# Allegro board 112G_224G_Serdes_PCB.brd
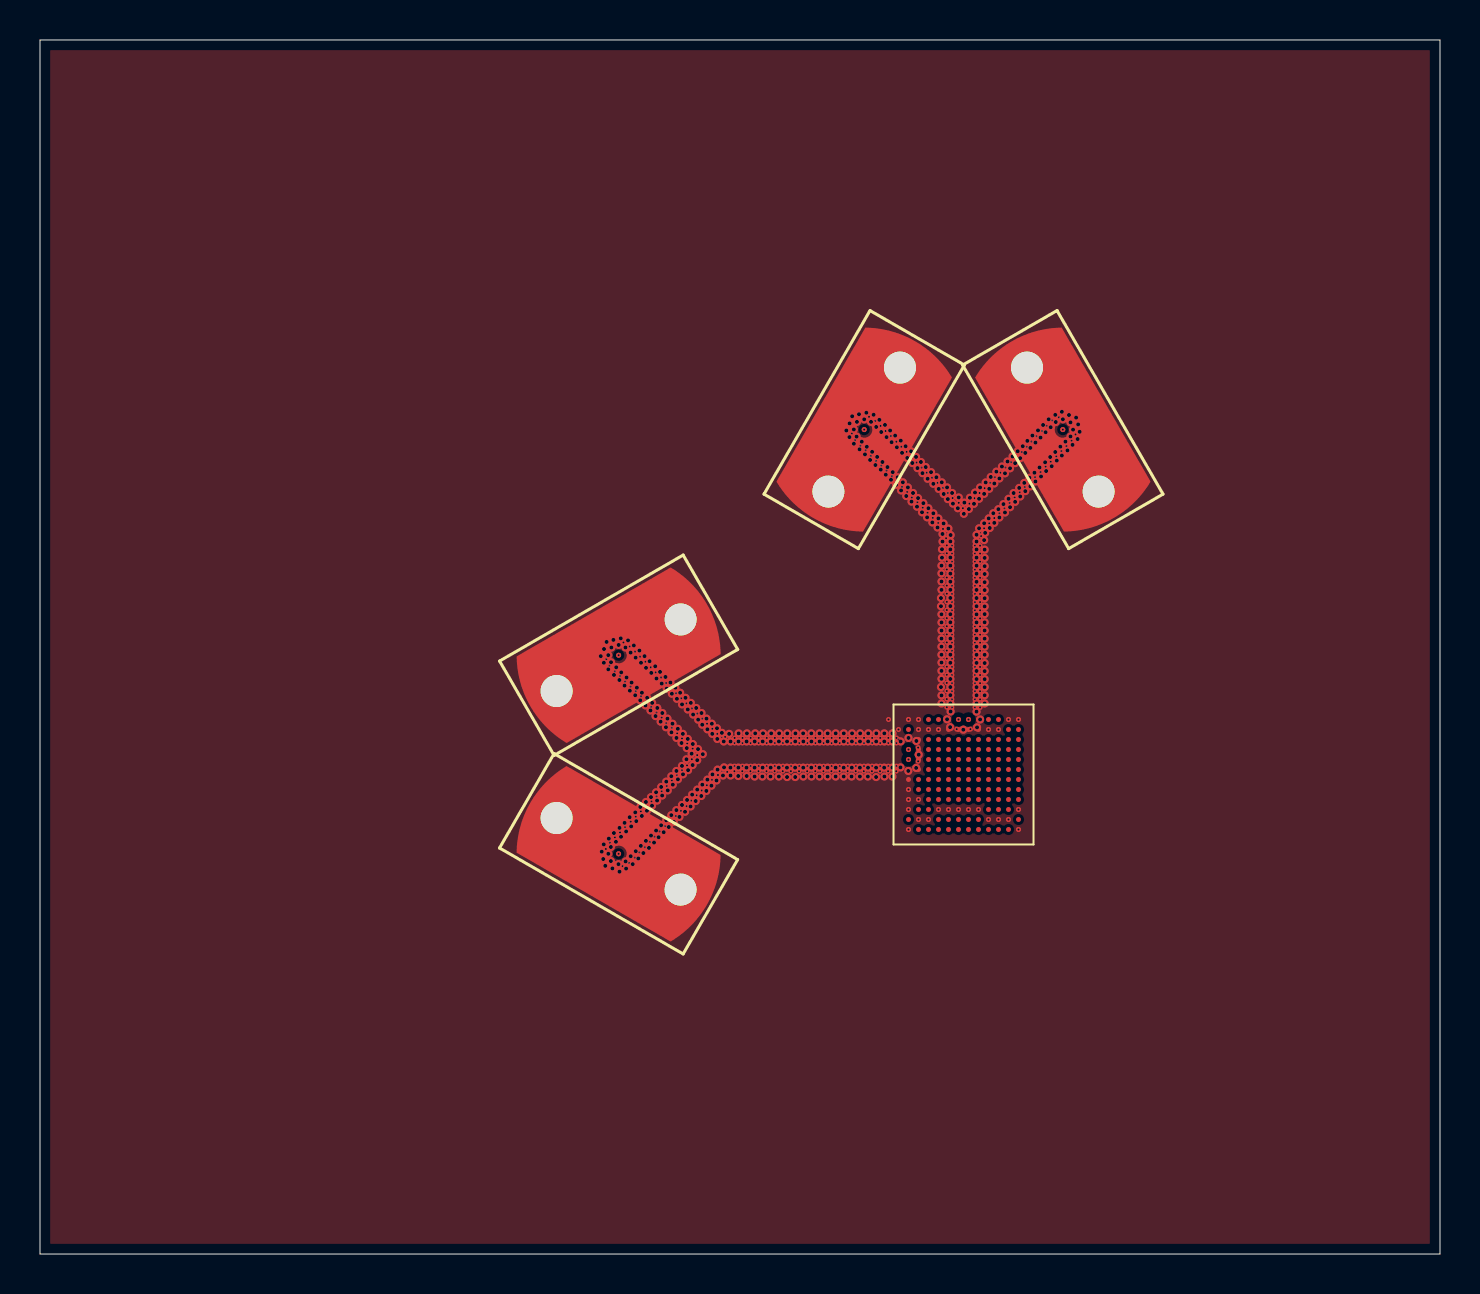
[diagram p0: board, top side]
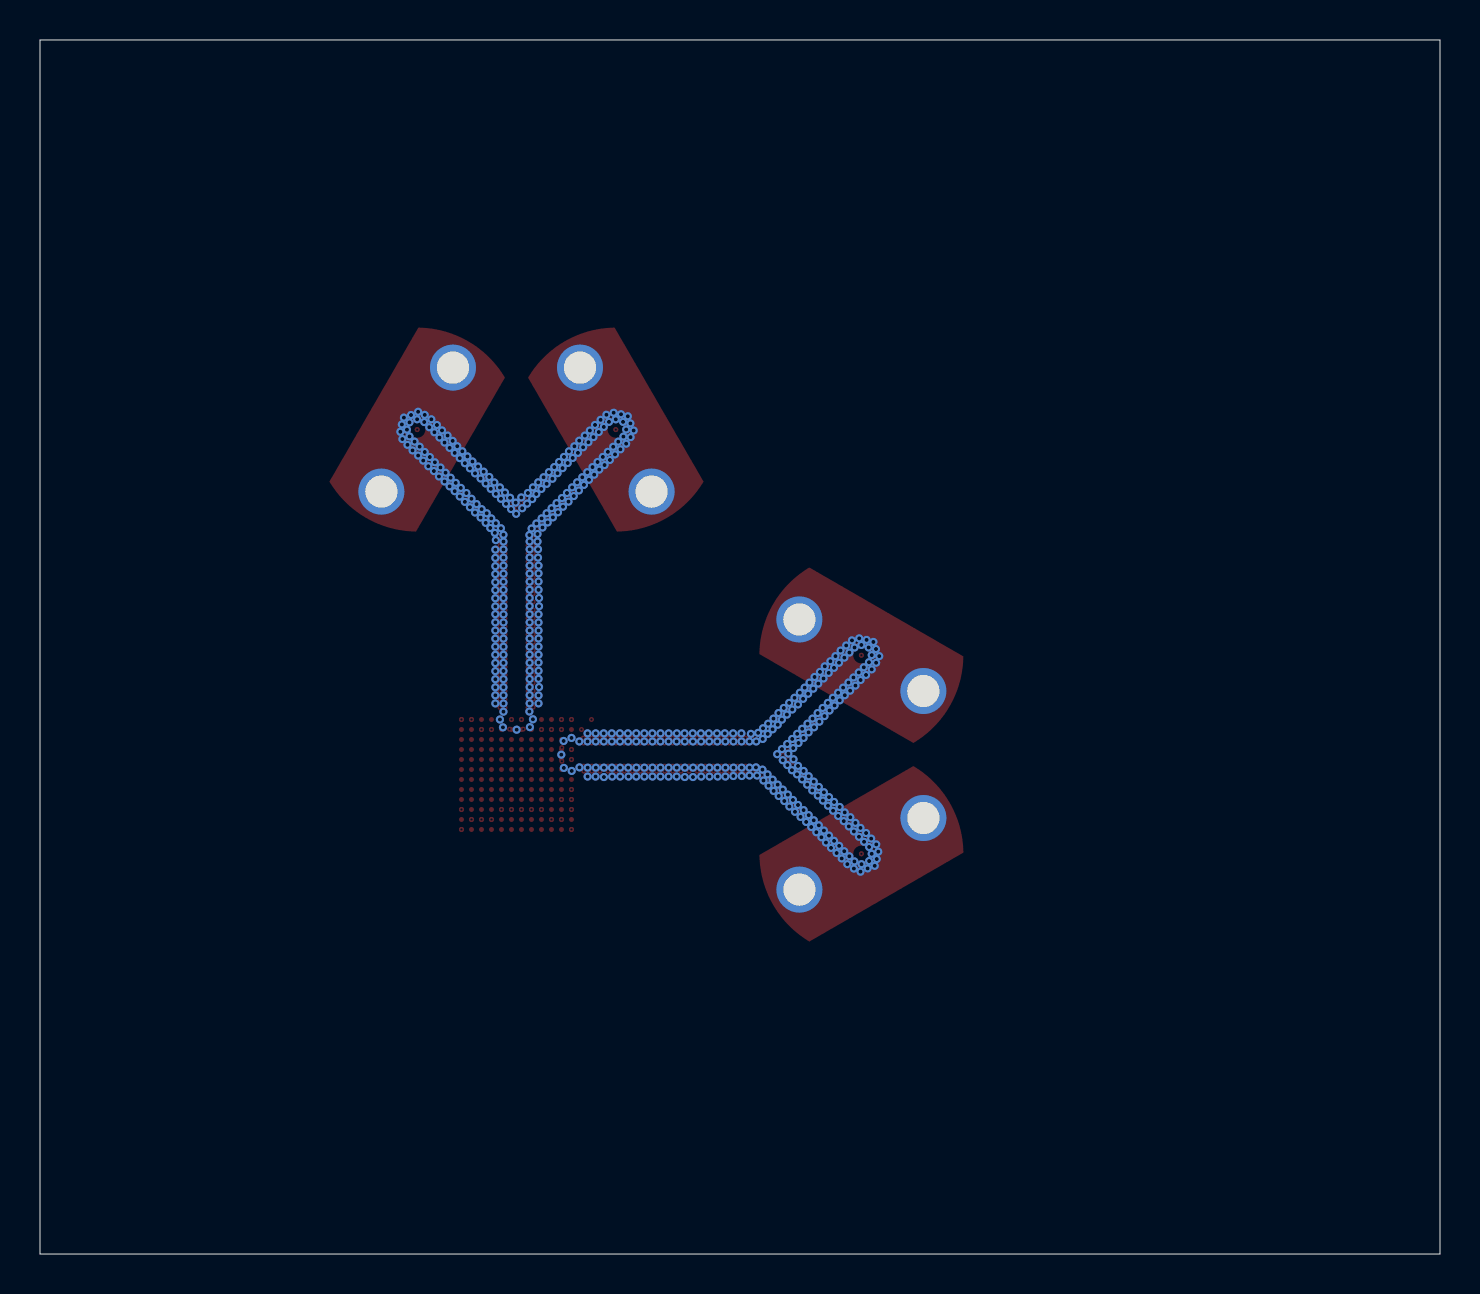
[diagram p1: board, bottom side, seen from below]

Outline 70 x 60.71 mm; copper layers: TOP, SIGNAL02, GND03, GND04, GND05, GND06, GND07, BOTTOM. Coordinates in mm from the lower left corner of the outline.
Outline path: 0,60.71 0,0 70,0 70,60.71 0,60.71

## Design rules (mm)
constraint set DEFAULT: min track width 0.132
net group SDS_RX0: nets SDS_RX0N SDS_RX0P
net group SDS_TX0: nets SDS_TX0N SDS_TX0P

## Placement (name value [footprint] x y rotation side)
J1  -  [DJ0S-6H]  41.21 41.22 60 top
J2  -  [DJ0S-6H]  51.14 41.22 300 top
J3  -  [DJ0S-6H]  28.93 29.94 210 top
J4  -  [DJ0S-6H]  28.93 20.01 330 top
NOREF  -  []  -70.45 -75.56 0 top
NOREF#2  -  []  -32.97 74.68 0 top
U1  P1_4  [BGA144]  46.18 23.98 0 top

## Library data of the parts
J1-J4 = DJ0S-6H
U1 = P1_8

## Footprints (pads in the part's own frame, mm; a bottom-side part is the same pattern mirrored in y, then rotated)
BGA144
  round 0.25 smd: A1(-2.75,2.75) A2(-2.25,2.75) A3(-1.75,2.75) A4(-1.25,2.75) A5(-0.75,2.75) A6(-0.25,2.75) A7(0.25,2.75) A8(0.75,2.75) A9(1.25,2.75) A10(1.75,2.75) A11(2.25,2.75) A12(2.75,2.75) B1(-2.75,2.25) B2(-2.25,2.25) B3(-1.75,2.25) B4(-1.25,2.25) B5(-0.75,2.25) B6(-0.25,2.25) B7(0.25,2.25) B8(0.75,2.25) B9(1.25,2.25) B10(1.75,2.25) B11(2.25,2.25) B12(2.75,2.25) C1(-2.75,1.75) C2(-2.25,1.75) C3(-1.75,1.75) C4(-1.25,1.75) C5(-0.75,1.75) C6(-0.25,1.75) C7(0.25,1.75) C8(0.75,1.75) C9(1.25,1.75) C10(1.75,1.75) C11(2.25,1.75) C12(2.75,1.75) D1(-2.75,1.25) D2(-2.25,1.25) D3(-1.75,1.25) D4(-1.25,1.25) D5(-0.75,1.25) D6(-0.25,1.25) D7(0.25,1.25) D8(0.75,1.25) D9(1.25,1.25) D10(1.75,1.25) D11(2.25,1.25) D12(2.75,1.25) E1(-2.75,0.75) E2(-2.25,0.75) E3(-1.75,0.75) E4(-1.25,0.75) E5(-0.75,0.75) E6(-0.25,0.75) E7(0.25,0.75) E8(0.75,0.75) E9(1.25,0.75) E10(1.75,0.75) E11(2.25,0.75) E12(2.75,0.75) F1(-2.75,0.25) F2(-2.25,0.25) F3(-1.75,0.25) F4(-1.25,0.25) F5(-0.75,0.25) F6(-0.25,0.25) F7(0.25,0.25) F8(0.75,0.25) F9(1.25,0.25) F10(1.75,0.25) F11(2.25,0.25) F12(2.75,0.25) G1(-2.75,-0.25) G2(-2.25,-0.25) G3(-1.75,-0.25) G4(-1.25,-0.25) G5(-0.75,-0.25) G6(-0.25,-0.25) G7(0.25,-0.25) G8(0.75,-0.25) G9(1.25,-0.25) G10(1.75,-0.25) G11(2.25,-0.25) G12(2.75,-0.25) H1(-2.75,-0.75) H2(-2.25,-0.75) H3(-1.75,-0.75) H4(-1.25,-0.75) H5(-0.75,-0.75) H6(-0.25,-0.75) H7(0.25,-0.75) H8(0.75,-0.75) H9(1.25,-0.75) H10(1.75,-0.75) H11(2.25,-0.75) H12(2.75,-0.75) J1(-2.75,-1.25) J2(-2.25,-1.25) J3(-1.75,-1.25) J4(-1.25,-1.25) J5(-0.75,-1.25) J6(-0.25,-1.25) J7(0.25,-1.25) J8(0.75,-1.25) J9(1.25,-1.25) J10(1.75,-1.25) J11(2.25,-1.25) J12(2.75,-1.25) K1(-2.75,-1.75) K2(-2.25,-1.75) K3(-1.75,-1.75) K4(-1.25,-1.75) K5(-0.75,-1.75) K6(-0.25,-1.75) K7(0.25,-1.75) K8(0.75,-1.75) K9(1.25,-1.75) K10(1.75,-1.75) K11(2.25,-1.75) K12(2.75,-1.75) L1(-2.75,-2.25) L2(-2.25,-2.25) L3(-1.75,-2.25) L4(-1.25,-2.25) L5(-0.75,-2.25) L6(-0.25,-2.25) L7(0.25,-2.25) L8(0.75,-2.25) L9(1.25,-2.25) L10(1.75,-2.25) L11(2.25,-2.25) L12(2.75,-2.25) M1(-2.75,-2.75) M2(-2.25,-2.75) M3(-1.75,-2.75) M4(-1.25,-2.75) M5(-0.75,-2.75) M6(-0.25,-2.75) M7(0.25,-2.75) M8(0.75,-2.75) M9(1.25,-2.75) M10(1.75,-2.75) M11(2.25,-2.75) M12(2.75,-2.75)
DJ0S-6H
  round 0.24 smd: 1(0,0)
  round 2.3 hole 1.6: 2(3.58,0) 3(-3.58,0)

## Nets
GND: J1.2 J1.3 J2.2 J2.3 J3.2 J3.3 J4.2 J4.3 U1.A1 U1.A2 U1.A5 U1.A8 U1.A11 U1.A12 U1.B2 U1.B3 U1.B4 U1.B5 U1.B6 U1.B7 U1.B8 U1.B9 U1.B10 U1.C1 U1.C2 U1.D2 U1.E2 U1.F1 U1.F2 U1.G1 U1.H1 U1.J1 U1.J2 U1.K1 U1.K4 U1.K5 U1.K6 U1.K7 U1.K8 U1.K12 U1.L2 U1.L3 U1.L9 U1.L10 U1.L11 U1.M1 U1.M12
SDS_RX0N: J1.1 U1.A6
SDS_RX0P: J2.1 U1.A7
SDS_TX0N: J3.1 U1.D1
SDS_TX0P: J4.1 U1.E1

Pads without a net: U1 A3 A4 A9 A10 B1 B11 B12 C3 C4 C5 C6 C7 C8 C9 C10 C11 C12 D3 D4 D5 D6 D7 D8 D9 D10 D11 D12 E3 E4 E5 E6 E7 E8 E9 E10 E11 E12 F3 F4 F5 F6 F7 F8 F9 F10 F11 F12 G2 G3 G4 G5 G6 G7 G8 G9 G10 G11 G12 H2 H3 H4 H5 H6 H7 H8 H9 H10 H11 H12 J3 J4 J5 J6 J7 J8 J9 J10 J11 J12 K2 K3 K9 K10 K11 L1 L4 L5 L6 L7 L8 L12 M2 M3 M4 M5 M6 M7 M8 M9 M10 M11

## Via types
v1: diameter 0.254, hole 0.102, TOP to SIGNAL02, 363 vias
v2: diameter 0.406, hole 0.203, TOP to BOTTOM, 514 vias
v3: diameter 0.381, hole 0.203, SIGNAL02 to GND07, 4 vias

## Routing (per net, layer and track width the routed paths; a pad name or vN(x,y) marks a point on that pad's centre or on a via; arc(x,y) is an arc through that point)
GND:
  vias: v1(28.31,29.74) v1(28.29,20.25) v1(28.47,29.41) v1(28.49,20.57) v1(28.74,29.13) v1(28.75,20.83) v1(29,28.91) v1(29,21.08) v1(29.13,19.39) v1(29.17,30.58) v1(29.26,28.63) v1(29.26,21.35) v1(29.49,30.38) v1(29.53,28.37) v1(29.46,19.55) v1(29.53,21.62) v1(29.75,30.12) v1(29.79,28.14) v1(29.79,21.86) v1(29.74,19.82) v1(30,29.87) v1(29.97,20.08) v1(30.05,27.89) v1(30.04,22.14) v1(30.27,29.62) v1(30.32,27.61) v1(30.32,22.38) v1(30.25,20.34) v1(30.5,20.61) v1(30.54,29.34) v1(30.56,27.36) v1(30.58,22.63) v1(30.73,20.87) v1(30.78,29.08) v1(30.83,27.08) v1(30.83,22.88) v1(30.98,21.13) v1(31.06,28.83) v1(31.08,26.82) v1(31.08,23.14) v1(31.31,28.55) v1(31.31,26.54) v1(31.26,21.4) v1(31.34,23.4) v1(31.52,21.64) v1(31.55,28.3) v1(31.59,26.31) v1(31.59,23.68) v1(31.8,28.04) v1(31.8,21.9) v1(31.86,26.04) v1(31.85,23.95) v1(32.06,27.79) v1(32.1,25.78) v1(32.1,24.19) v1(32.05,22.16) v1(32.32,27.53) v1(32.33,22.39) v1(32.36,25.53) v1(32.35,24.43) v1(32.6,27.28) v1(32.59,24.74) v1(32.56,22.67) v1(32.63,25.27) v1(32.87,27.03) v1(32.86,24.95) v1(32.84,22.94) v1(33.11,26.77) v1(33.09,23.18) v1(33.35,26.52) v1(33.34,23.44) v1(33.62,26.26) v1(33.6,23.71) v1(33.87,26.01) v1(33.9,23.95) v1(34.26,25.86) v1(34.36,24.1) v1(34.73,25.81) v1(34.73,25.55) v1(34.73,24.4) v1(34.72,24.14) v1(35.13,25.81) v1(35.13,25.55) v1(35.13,24.4) v1(35.12,24.14) v1(35.53,25.55) v1(35.53,24.4) v1(35.52,24.14) v1(35.53,25.81) v1(35.93,24.14) v1(35.94,25.81) v1(35.94,25.55) v1(35.94,24.4) v1(36.33,24.14) v1(36.34,25.81) v1(36.34,25.55) v1(36.34,24.4) v1(36.73,24.14) v1(36.74,25.81) v1(36.74,25.55) v1(36.74,24.4) v1(37.15,25.81) v1(37.15,25.55) v1(37.15,24.4) v1(37.14,24.14) v1(37.56,25.81) v1(37.55,25.55) v1(37.55,24.4) v1(37.54,24.14) v1(37.97,25.81) v1(37.96,25.55) v1(37.96,24.4) v1(37.95,24.14) v1(38.37,25.81) v1(38.37,25.55) v1(38.37,24.4) v1(38.36,24.14) v1(38.78,25.81) v1(38.77,25.55) v1(38.77,24.4) v1(38.76,24.14) v1(39.18,25.81) v1(39.18,25.55) v1(39.18,24.4) v1(39.17,24.14) v1(39.59,25.81) v1(39.58,25.55) v1(39.58,24.4) v1(39.57,24.14) v1(39.99,25.81) v1(39.99,25.55) v1(39.99,24.4) v1(39.98,24.14) v1(40.39,25.81) v1(40.39,25.55) v1(40.39,24.4) v1(40.38,24.14) v1(40.59,41.03) v1(40.75,40.7) v1(40.8,25.81) v1(40.8,25.55) v1(40.8,24.4) v1(40.79,24.14) v1(41.02,40.42) v1(41.2,25.81) v1(41.2,25.55) v1(41.2,24.4) v1(41.19,24.14) v1(41.28,40.19) v1(41.45,41.86) v1(41.54,39.91) v1(41.61,25.81) v1(41.61,25.55) v1(41.61,24.4) v1(41.6,24.14) v1(41.77,41.66) v1(41.81,39.65) v1(42.03,41.41) v1(42.01,25.81) v1(42.01,25.55) v1(42.01,24.4) v1(42,24.14) v1(42.07,39.43) v1(42.28,41.15) v1(42.33,39.17) v1(42.43,26.73) v1(42.42,25.81) v1(42.42,25.55) v1(42.42,24.4) v1(42.41,24.14) v1(42.55,40.9) v1(42.6,38.89) v1(42.82,40.62) v1(42.83,25.81) v1(42.82,25.55) v1(42.82,24.4) v1(42.81,24.14) v1(42.84,38.64) v1(42.93,26.23) v1(42.93,25.73) v1(43.06,40.37) v1(43.1,38.36) v1(43.34,40.11) v1(43.36,38.11) v1(43.43,26.73) v1(43.43,23.23) v1(43.43,22.73) v1(43.43,22.23) v1(43.43,21.23) v1(43.58,39.83) v1(43.59,37.83) v1(43.83,39.58) v1(43.87,37.6) v1(43.93,26.73) v1(43.93,26.23) v1(43.91,25.32) v1(43.91,24.64) v1(43.93,22.73) v1(43.93,21.73) v1(44.08,39.32) v1(44.14,37.32) v1(44.34,39.07) v1(44.38,37.06) v1(44.43,26.23) v1(44.43,21.73) v1(44.6,38.82) v1(44.64,36.81) v1(44.88,38.56) v1(44.91,36.56) v1(44.93,26.23) v1(44.93,22.23) v1(45.15,38.31) v1(45.15,36.26) v1(45.3,35.79) v1(45.39,38.05) v1(45.34,35.44) v1(45.34,35.04) v1(45.34,34.63) v1(45.34,34.23) v1(45.34,33.83) v1(45.34,33.42) v1(45.34,33.02) v1(45.34,32.61) v1(45.34,32.2) v1(45.34,31.8) v1(45.34,31.39) v1(45.34,30.98) v1(45.34,30.58) v1(45.34,30.18) v1(45.34,29.77) v1(45.34,29.37) v1(45.34,28.96) v1(45.34,28.56) v1(45.34,28.15) v1(45.34,27.75) v1(45.34,27.34) v1(45.43,22.23) v1(45.63,37.8) v1(45.6,35.43) v1(45.6,35.03) v1(45.6,34.62) v1(45.6,34.22) v1(45.6,33.82) v1(45.6,33.41) v1(45.6,33.01) v1(45.6,32.6) v1(45.6,32.19) v1(45.6,31.79) v1(45.6,31.38) v1(45.6,30.97) v1(45.6,30.57) v1(45.6,30.17) v1(45.6,29.76) v1(45.6,29.36) v1(45.6,28.95) v1(45.6,28.55) v1(45.6,28.14) v1(45.6,27.74) v1(45.6,27.33) v1(45.84,26.25) v1(45.93,22.23) v1(45.94,37.56) v1(46.14,37.29) v1(46.43,22.23) v1(46.47,37.52) v1(46.52,26.25) v1(46.73,37.79) v1(46.75,35.43) v1(46.75,35.03) v1(46.75,34.62) v1(46.75,34.22) v1(46.75,33.82) v1(46.75,33.41) v1(46.75,33.01) v1(46.75,32.6) v1(46.75,32.19) v1(46.75,31.79) v1(46.75,31.38) v1(46.75,30.97) v1(46.75,30.57) v1(46.75,30.17) v1(46.75,29.76) v1(46.75,29.36) v1(46.75,28.95) v1(46.75,28.55) v1(46.75,28.14) v1(46.75,27.74) v1(46.75,27.33) v1(46.93,22.23) v1(46.98,38.05) v1(47.01,35.42) v1(47.01,35.03) v1(47.01,34.62) v1(47.01,34.22) v1(47.01,33.82) v1(47.01,33.41) v1(47.01,33) v1(47.01,32.6) v1(47.01,32.19) v1(47.01,31.78) v1(47.01,31.38) v1(47.01,30.97) v1(47.01,30.57) v1(47.01,30.16) v1(47.01,29.76) v1(47.01,29.35) v1(47.01,28.95) v1(47.01,28.54) v1(47.01,28.14) v1(47.01,27.74) v1(47.01,27.33) v1(47.06,35.9) v1(47.21,36.29) v1(47.23,38.3) v1(47.43,26.23) v1(47.43,21.73) v1(47.51,38.56) v1(47.46,36.54) v1(47.72,36.8) v1(47.74,38.84) v1(47.93,26.23) v1(47.93,21.73) v1(48.02,39.07) v1(47.97,37.04) v1(48.23,37.29) v1(48.28,39.33) v1(48.43,26.73) v1(48.43,21.73) v1(48.48,37.56) v1(48.56,39.59) v1(48.73,37.83) v1(48.81,39.83) v1(48.93,26.73) v1(48.93,22.23) v1(48.93,21.23) v1(48.99,38.09) v1(49.09,40.1) v1(49.24,38.35) v1(49.34,40.37) v1(49.5,38.6) v1(49.57,40.63) v1(49.83,40.89) v1(49.75,38.85) v1(50.03,39.1) v1(50.1,41.15) v1(50.33,41.41) v1(50.28,39.37) v1(50.61,41.68) v1(50.54,39.61) v1(50.82,39.89) v1(50.94,41.84) v1(51.07,40.15) v1(51.32,40.4) v1(51.58,40.67) v1(51.78,40.98) v2(28.04,29.9) v2(28.09,20.12) v2(28.2,30.25) v2(28.19,29.57) v2(28.19,20.48) v2(28.16,19.75) v2(28.33,30.61) v2(28.26,19.41) v2(28.41,29.95) v2(28.41,29.24) v2(28.42,20.01) v2(28.44,20.77) v2(28.57,30.33) v2(28.55,29.59) v2(28.54,20.35) v2(28.54,19.65) v2(28.62,19.28) v2(28.67,30.71) v2(28.7,28.96) v2(28.7,21.05) v2(28.81,29.34) v2(28.8,20.61) v2(28.93,30.45) v2(28.93,19.49) v2(28.97,28.7) v2(28.98,21.31) v2(28.98,19.12) v2(29.04,30.78) v2(29.06,29.08) v2(29.05,20.86) v2(29.23,28.42) v2(29.23,21.56) v2(29.27,30.33) v2(29.33,28.83) v2(29.31,21.13) v2(29.28,19.63) v2(29.31,19.27) v2(29.4,30.68) v2(29.53,30.07) v2(29.49,28.17) v2(29.48,21.84) v2(29.58,28.57) v2(29.56,21.38) v2(29.53,19.89) v2(29.69,30.43) v2(29.64,19.49) v2(29.78,29.82) v2(29.76,27.94) v2(29.76,22.08) v2(29.81,21.65) v2(29.79,20.14) v2(29.84,28.32) v2(29.92,19.78) v2(29.97,30.18) v2(30.01,27.69) v2(30.02,22.35) v2(30.05,29.57) v2(30.1,28.07) v2(30.09,21.9) v2(30.04,20.41) v2(30.23,29.9) v2(30.17,20.05) v2(30.3,29.31) v2(30.27,27.43) v2(30.3,22.6) v2(30.3,20.66) v2(30.36,27.81) v2(30.35,22.17) v2(30.48,29.64) v2(30.53,27.18) v2(30.45,20.31) v2(30.57,29.06) v2(30.61,27.56) v2(30.55,22.85) v2(30.6,22.42) v2(30.55,20.92) v2(30.7,20.57) v2(30.76,29.39) v2(30.83,28.78) v2(30.78,26.9) v2(30.8,23.09) v2(30.8,21.18) v2(30.87,27.3) v2(30.86,22.67) v2(30.93,20.84) v2(31,29.11) v2(31.03,26.62) v2(31.09,28.52) v2(31.12,27.05) v2(31.06,23.36) v2(31.11,22.93) v2(31.06,21.44) v2(31.19,21.09) v2(31.28,28.85) v2(31.3,26.34) v2(31.31,23.62) v2(31.31,21.69) v2(31.34,28.27) v2(31.37,26.77) v2(31.39,23.18) v2(31.52,28.57) v2(31.44,21.35) v2(31.6,28.02) v2(31.63,26.52) v2(31.57,26.09) v2(31.57,23.89) v2(31.57,21.95) v2(31.64,23.47) v2(31.69,21.6) v2(31.77,28.32) v2(31.82,25.81) v2(31.82,24.16) v2(31.82,22.2) v2(31.85,27.76) v2(31.89,26.26) v2(31.9,23.74) v2(32.01,28.07) v2(31.97,21.86) v2(32.1,27.48) v2(32.08,25.55) v2(32.1,24.41) v2(32.1,22.45) v2(32.14,26.01) v2(32.15,23.99) v2(32.28,27.81) v2(32.32,24.74) v2(32.25,22.11) v2(32.39,27.23) v2(32.39,25.76) v2(32.34,25.3) v2(32.41,24.19) v2(32.35,22.7) v2(32.53,22.38) v2(32.54,27.56) v2(32.58,25.02) v2(32.63,24.45) v2(32.61,22.97) v2(32.66,26.97) v2(32.64,25.5) v2(32.81,27.3) v2(32.79,22.65) v2(32.91,26.72) v2(32.9,25.25) v2(32.86,24.69) v2(32.86,23.22) v2(33.08,27.05) v2(33.11,26.47) v2(33.12,23.47) v2(33.07,22.9) v2(33.14,24.99) v2(33.33,26.77) v2(33.32,23.16) v2(33.37,26.24) v2(33.37,23.72) v2(33.59,26.52) v2(33.61,26.01) v2(33.62,23.98) v2(33.57,23.42) v2(33.83,23.68) v2(33.85,26.29) v2(33.87,25.76) v2(33.88,24.22) v2(34.09,26.06) v2(34.19,25.63) v2(34.2,24.33) v2(34.15,23.93) v2(34.46,26.01) v2(34.53,25.63) v2(34.52,24.32) v2(34.53,23.93) v2(34.93,26.04) v2(34.92,25.63) v2(34.92,24.32) v2(34.91,23.9) v2(35.33,25.63) v2(35.33,24.32) v2(35.35,26.04) v2(35.33,23.9) v2(35.73,24.32) v2(35.73,23.88) v2(35.76,26.04) v2(35.74,25.63) v2(36.13,24.32) v2(36.12,23.88) v2(36.15,26.04) v2(36.14,25.63) v2(36.53,23.88) v2(36.56,26.04) v2(36.54,25.63) v2(36.54,24.32) v2(36.96,26.04) v2(36.95,25.63) v2(36.94,24.32) v2(36.94,23.88) v2(37.36,26.04) v2(37.35,25.63) v2(37.35,24.32) v2(37.35,23.85) v2(37.77,26.04) v2(37.76,25.63) v2(37.76,24.32) v2(37.76,23.85) v2(38.16,26.04) v2(38.17,25.63) v2(38.16,24.32) v2(38.17,23.88) v2(38.57,26.04) v2(38.57,25.63) v2(38.57,24.32) v2(38.57,23.88) v2(38.98,26.04) v2(38.98,25.63) v2(38.98,24.32) v2(38.98,23.88) v2(39.39,26.04) v2(39.38,25.63) v2(39.38,24.32) v2(39.38,23.88) v2(39.79,26.04) v2(39.79,25.63) v2(39.78,24.32) v2(39.78,23.88) v2(40.19,26.04) v2(40.19,25.63) v2(40.19,24.32) v2(40.19,23.88) v2(40.32,41.18) v2(40.48,41.53) v2(40.47,40.85) v2(40.61,41.89) v2(40.6,26.04) v2(40.6,25.63) v2(40.59,24.32) v2(40.58,23.88) v2(40.69,41.23) v2(40.69,40.52) v2(40.83,40.87) v2(40.85,41.61) v2(40.95,41.99) v2(40.98,40.24) v2(41.01,26.04) v2(41,25.63) v2(41,24.32) v2(41,23.88) v2(41.09,40.62) v2(41.21,41.74) v2(41.32,42.07) v2(41.25,39.98) v2(41.34,40.37) v2(41.41,26.04) v2(41.41,25.63) v2(41.4,24.32) v2(41.39,23.88) v2(41.51,39.71) v2(41.55,41.61) v2(41.61,40.11) v2(41.68,41.97) v2(41.81,41.36) v2(41.77,39.45) v2(41.82,26.04) v2(41.81,25.63) v2(41.81,24.32) v2(41.81,23.85) v2(41.86,39.86) v2(41.97,41.71) v2(42.06,41.1) v2(42.12,39.6) v2(42.04,39.22) v2(42.22,26.04) v2(42.21,25.63) v2(42.21,24.32) v2(42.22,23.88) v2(42.25,41.46) v2(42.33,40.85) v2(42.29,38.97) v2(42.38,39.35) v2(42.51,41.18) v2(42.58,40.59) v2(42.55,38.71) v2(42.62,26.04) v2(42.62,25.63) v2(42.62,24.32) v2(42.62,23.88) v2(42.64,39.1) v2(42.76,40.92) v2(42.8,38.46) v2(42.85,40.34) v2(42.89,38.84) v2(43.03,24.33) v2(43.04,40.67) v2(43.1,40.06) v2(43.06,38.18) v2(43.04,25.63) v2(43.14,38.59) v2(43.28,40.39) v2(43.31,37.9) v2(43.37,39.81) v2(43.4,38.33) v2(43.43,25.81) v2(43.42,24.16) v2(43.55,40.14) v2(43.62,39.55) v2(43.58,37.62) v2(43.65,38.05) v2(43.8,39.86) v2(43.82,25.65) v2(43.81,24.31) v2(43.87,39.3) v2(43.9,37.8) v2(43.85,37.37) v2(43.94,24.97) v2(44.05,39.6) v2(44.13,39.05) v2(44.1,37.09) v2(44.17,37.55) v2(44.29,39.35) v2(44.38,38.77) v2(44.42,37.29) v2(44.36,36.84) v2(44.55,39.1) v2(44.62,36.58) v2(44.67,38.51) v2(44.67,37.04) v2(44.82,38.84) v2(44.92,36.78) v2(44.88,36.33) v2(44.94,38.26) v2(45.09,38.59) v2(45.13,36) v2(45.13,35.63) v2(45.1,35.24) v2(45.1,34.82) v2(45.08,34.42) v2(45.08,34.04) v2(45.08,33.63) v2(45.08,33.21) v2(45.05,32.8) v2(45.05,32.39) v2(45.08,31.99) v2(45.08,31.58) v2(45.08,31.18) v2(45.08,30.77) v2(45.08,30.37) v2(45.08,29.97) v2(45.08,29.58) v2(45.08,29.16) v2(45.08,28.76) v2(45.05,28.35) v2(45.08,27.93) v2(45.08,27.53) v2(45.19,38) v2(45.18,36.53) v2(45.35,38.33) v2(45.39,37.75) v2(45.42,36.28) v2(45.36,26.74) v2(45.53,35.95) v2(45.52,35.63) v2(45.52,35.23) v2(45.52,34.83) v2(45.52,34.42) v2(45.52,34.02) v2(45.52,33.62) v2(45.52,33.21) v2(45.52,32.81) v2(45.52,32.4) v2(45.52,31.99) v2(45.52,31.59) v2(45.52,31.18) v2(45.52,30.78) v2(45.52,30.37) v2(45.52,29.97) v2(45.52,29.56) v2(45.52,29.16) v2(45.52,28.75) v2(45.52,28.35) v2(45.52,27.95) v2(45.52,27.54) v2(45.53,27.13) v2(45.51,26.34) v2(45.61,38.05) v2(45.65,37.52) v2(45.89,37.29) v2(45.94,37.83) v2(46.22,37.57) v2(46.19,37.01) v2(46.17,26.22) v2(46.5,37.82) v2(46.45,37.25) v2(46.7,37.51) v2(46.75,38.08) v2(46.83,35.97) v2(46.83,35.63) v2(46.83,35.23) v2(46.83,34.82) v2(46.83,34.42) v2(46.83,34.02) v2(46.83,33.61) v2(46.83,33.21) v2(46.83,32.8) v2(46.83,32.39) v2(46.83,31.99) v2(46.83,31.58) v2(46.83,31.17) v2(46.83,30.77) v2(46.83,30.37) v2(46.83,29.96) v2(46.83,29.56) v2(46.83,29.15) v2(46.83,28.75) v2(46.83,28.34) v2(46.83,27.94) v2(46.83,27.53) v2(46.83,27.12) v2(46.85,26.33) v2(47.01,38.33) v2(46.96,37.76) v2(46.96,36.29) v2(47.01,26.73) v2(47.21,38.01) v2(47.21,36.54) v2(47.21,35.7) v2(47.29,38.58) v2(47.26,36.06) v2(47.23,35.22) v2(47.23,34.81) v2(47.23,34.39) v2(47.23,34) v2(47.23,33.59) v2(47.23,33.2) v2(47.23,32.79) v2(47.23,32.38) v2(47.23,32) v2(47.23,31.59) v2(47.23,31.18) v2(47.23,30.77) v2(47.23,30.37) v2(47.23,29.96) v2(47.23,29.55) v2(47.23,29.15) v2(47.23,28.74) v2(47.23,28.34) v2(47.23,27.94) v2(47.23,27.53) v2(47.46,38.26) v2(47.44,36.78) v2(47.49,36.3) v2(47.54,38.86) v2(47.72,38.53) v2(47.67,37.04) v2(47.72,36.56) v2(47.82,39.12) v2(47.92,37.25) v2(47.97,38.78) v2(47.97,36.83) v2(48.1,39.38) v2(48.17,37.5) v2(48.25,39.04) v2(48.25,37.08) v2(48.38,39.63) v2(48.43,37.76) v2(48.5,39.29) v2(48.5,37.34) v2(48.63,39.88) v2(48.68,38.05) v2(48.76,39.55) v2(48.76,37.61) v2(48.89,40.14) v2(49.01,39.8) v2(48.96,38.31) v2(49.01,37.88) v2(49.14,40.39) v2(49.22,38.56) v2(49.27,40.06) v2(49.27,38.15) v2(49.37,40.66) v2(49.52,40.31) v2(49.47,38.82) v2(49.52,38.39) v2(49.62,40.93) v2(49.72,39.07) v2(49.77,40.57) v2(49.77,38.63) v2(49.9,41.18) v2(50.03,40.83) v2(49.98,39.33) v2(50.05,38.88) v2(50.16,41.46) v2(50.28,41.09) v2(50.26,39.59) v2(50.31,39.15) v2(50.44,41.74) v2(50.51,39.85) v2(50.54,41.34) v2(50.59,39.39) v2(50.77,41.96) v2(50.79,41.6) v2(50.77,40.1) v2(50.84,39.67) v2(51.02,40.37) v2(51.1,42.12) v2(51.1,39.93) v2(51.15,41.74) v2(51.27,40.62) v2(51.37,40.18) v2(51.45,41.95) v2(51.53,41.58) v2(51.53,40.88) v2(51.63,40.46) v2(51.65,41.22) v2(51.81,41.82) v2(51.91,41.48) v2(51.88,40.75) v2(51.98,41.11) v3(44.23,25.35) v3(44.22,24.56) v3(45.76,25.94) v3(46.55,25.93)
SDS_RX0N: length 16.5
  SIGNAL02 w0.122: v1(41.21,41.22) 46.04,36.4 46.04,26.84 v1(45.93,26.73)
SDS_RX0P: length 16.5
  SIGNAL02 w0.122: v1(46.43,26.73) 46.31,26.84 46.31,36.4 v1(51.14,41.22)
SDS_TX0N: length 16.5
  SIGNAL02 w0.076: 28.93,29.94 v1(28.93,29.94)
  SIGNAL02 w0.122: v1(28.93,29.94) 33.76,25.11 43.31,25.11 v1(43.43,25.23)
SDS_TX0P: length 16.5
  TOP w0.132: v1(43.43,24.73) 43.43,24.72
  SIGNAL02 w0.122: v1(43.43,24.73) 43.31,24.84 33.76,24.84 v1(28.93,20.01)

## Copper pours and planes (outline as drawn; the poured copper is in the pictures)
GND on TOP (solid shape): 31.53,34.33 31.62,34.28 31.79,34.17 31.95,34.05 32.11,33.93 32.27,33.8 32.42,33.67 32.56,33.53 32.7,33.38 32.83,33.23 32.96,33.07 33.08,32.91 33.19,32.75 33.3,32.58 33.4,32.4 33.49,32.23 33.58,32.04 33.66,31.86 33.73,31.67 33.8,31.48 33.85,31.29 33.9,31.09 33.94,30.9 33.98,30.7 34,30.5 34.02,30.3 34.03,30.1 34.03,30 26.33,25.55 26.25,25.61 26.08,25.71 25.91,25.83 25.75,25.95 25.6,26.08 25.45,26.21 25.31,26.35 25.17,26.5 25.03,26.65 24.91,26.81 24.79,26.97 24.67,27.13 24.57,27.3 24.47,27.48 24.37,27.66 24.29,27.84 24.21,28.02 24.13,28.21 24.07,28.4 24.01,28.59 23.96,28.79 23.92,28.98 23.89,29.18 23.86,29.38 23.84,29.58 23.83,29.78 23.83,29.88 23.93,29.94 28.53,29.94 28.53,29.88 28.54,29.83 28.56,29.78 28.59,29.73 28.62,29.68 28.66,29.64 28.71,29.6 28.75,29.58 28.81,29.55 28.86,29.54 28.92,29.53 28.98,29.54 29.03,29.55 29.09,29.56 29.14,29.59 29.18,29.62 29.23,29.66 29.26,29.7 29.29,29.75 29.31,29.8 29.33,29.86 29.34,29.91 29.34,29.97 29.33,30.03 29.31,30.08 29.29,30.13 29.26,30.18 29.23,30.22 29.18,30.26 29.14,30.29 29.09,30.32 29.03,30.34 28.98,30.35 28.92,30.35 28.86,30.34 28.81,30.33 28.75,30.31 28.71,30.28 28.66,30.24 28.62,30.2 28.59,30.16 28.56,30.11 28.54,30.05 28.53,30 28.53,29.94 23.93,29.94
GND on TOP (solid shape): 34.03,19.95 34.03,19.85 34.02,19.65 34,19.45 33.97,19.25 33.94,19.06 33.9,18.86 33.85,18.66 33.79,18.47 33.73,18.28 33.66,18.09 33.58,17.91 33.49,17.73 33.4,17.55 33.3,17.38 33.19,17.21 33.08,17.04 32.96,16.88 32.83,16.72 32.7,16.57 32.56,16.43 32.41,16.29 32.26,16.15 32.11,16.02 31.95,15.9 31.79,15.79 31.62,15.68 31.53,15.62 23.93,20.01 28.52,20.01 28.53,19.96 28.54,19.9 28.56,19.85 28.59,19.8 28.62,19.75 28.66,19.71 28.7,19.67 28.75,19.65 28.8,19.62 28.86,19.61 28.92,19.61 28.97,19.61 29.03,19.62 29.08,19.63 29.13,19.66 29.18,19.69 29.22,19.73 29.26,19.77 29.29,19.82 29.31,19.87 29.33,19.93 29.34,19.98 29.34,20.04 29.33,20.1 29.31,20.15 29.29,20.2 29.26,20.25 29.22,20.29 29.18,20.33 29.13,20.36 29.08,20.39 29.03,20.41 28.97,20.42 28.92,20.42 28.86,20.41 28.8,20.4 28.75,20.38 28.7,20.35 28.66,20.31 28.62,20.27 28.59,20.23 28.56,20.18 28.54,20.12 28.53,20.07 28.52,20.01 23.93,20.01 23.83,20.07 23.83,20.17 23.84,20.37 23.86,20.57 23.89,20.77 23.92,20.97 23.96,21.16 24.01,21.36 24.07,21.55 24.13,21.74 24.2,21.93 24.28,22.12 24.37,22.3 24.46,22.47 24.56,22.65 24.67,22.82 24.79,22.98 24.91,23.15 25.03,23.3 25.17,23.45 25.3,23.6 25.45,23.74 25.6,23.87 25.75,24 25.91,24.12 26.08,24.24 26.24,24.35 26.33,24.4
GND on TOP (solid shape): 41.27,46.32 41.37,46.32 41.57,46.31 41.77,46.29 41.97,46.27 42.17,46.23 42.36,46.19 42.56,46.14 42.75,46.09 42.94,46.02 43.13,45.95 43.31,45.87 43.5,45.78 43.67,45.69 43.85,45.59 44.02,45.48 44.18,45.37 44.34,45.25 44.5,45.12 44.65,44.99 44.8,44.85 44.94,44.71 45.07,44.56 45.2,44.4 45.32,44.24 45.44,44.08 45.55,43.91 45.6,43.82 41.15,36.12 41.05,36.13 40.85,36.14 40.65,36.15 40.45,36.18 40.26,36.21 40.06,36.26 39.86,36.3 39.67,36.36 39.48,36.43 39.29,36.5 39.11,36.58 38.93,36.66 38.75,36.76 38.57,36.86 38.4,36.97 38.24,37.08 38.08,37.2 37.92,37.33 37.77,37.46 37.63,37.6 37.49,37.74 37.35,37.89 37.22,38.05 37.1,38.21 36.98,38.37 36.88,38.54 36.82,38.62 38.32,41.22 40.8,41.22 40.81,41.17 40.82,41.11 40.84,41.06 40.87,41.01 40.9,40.96 40.94,40.92 40.98,40.89 41.03,40.86 41.09,40.84 41.14,40.82 41.2,40.82 41.25,40.82 41.31,40.83 41.36,40.85 41.41,40.87 41.46,40.9 41.5,40.94 41.54,40.99 41.57,41.03 41.59,41.09 41.61,41.14 41.62,41.2 41.62,41.25 41.61,41.31 41.59,41.36 41.57,41.42 41.54,41.46 41.5,41.51 41.46,41.54 41.41,41.58 41.36,41.6 41.31,41.62 41.25,41.63 41.2,41.63 41.14,41.62 41.09,41.61 41.03,41.59 40.98,41.56 40.94,41.53 40.9,41.49 40.87,41.44 40.84,41.39 40.82,41.34 40.81,41.28 40.8,41.22 38.32,41.22
GND on TOP (solid shape): 55.53,38.62 55.48,38.54 55.37,38.37 55.25,38.21 55.13,38.05 55,37.89 54.87,37.74 54.73,37.6 54.58,37.46 54.43,37.33 54.28,37.2 54.12,37.08 53.95,36.97 53.78,36.86 53.61,36.76 53.43,36.66 53.25,36.58 53.06,36.5 52.87,36.43 52.68,36.36 52.49,36.31 52.3,36.26 52.1,36.21 51.9,36.18 51.7,36.15 51.5,36.14 51.3,36.13 51.2,36.12 48.26,41.22 50.74,41.22 50.74,41.17 50.75,41.11 50.77,41.06 50.8,41.01 50.83,40.96 50.87,40.92 50.92,40.89 50.96,40.86 51.02,40.84 51.07,40.82 51.13,40.82 51.19,40.82 51.24,40.83 51.3,40.85 51.35,40.87 51.39,40.9 51.44,40.94 51.47,40.99 51.5,41.03 51.53,41.09 51.54,41.14 51.55,41.2 51.55,41.25 51.54,41.31 51.53,41.36 51.5,41.42 51.47,41.46 51.44,41.51 51.39,41.54 51.35,41.58 51.3,41.6 51.24,41.62 51.19,41.63 51.13,41.63 51.07,41.62 51.02,41.61 50.96,41.59 50.92,41.56 50.87,41.53 50.83,41.49 50.8,41.44 50.77,41.39 50.75,41.34 50.74,41.28 50.74,41.22 48.26,41.22 46.76,43.82 46.81,43.91 46.92,44.08 47.03,44.24 47.15,44.4 47.28,44.56 47.42,44.71 47.56,44.85 47.7,44.99 47.85,45.12 48.01,45.25 48.17,45.37 48.34,45.48 48.51,45.59 48.68,45.69 48.86,45.78 49.04,45.87 49.22,45.95 49.41,46.02 49.6,46.09 49.8,46.14 49.99,46.19 50.19,46.23 50.38,46.27 50.58,46.29 50.78,46.31 50.99,46.32 51.09,46.32
GND on TOP, SIGNAL02, GND03: 0.51,60.2 69.49,60.2 69.49,0.51 0.51,0.51
GND on GND04: 0.56,0.51 0.52,0.52 0.51,0.56 0.51,60.15 0.52,60.18 0.56,60.2 69.44,60.2 69.48,60.18 69.49,60.15 69.49,0.56 69.48,0.52 69.44,0.51

## Text on the board
User.Comments: CR_UNNAMED_9
DIMENSION: If not use it,please delete it before you gerber out
